# Altium PCB RP2040_minimal(1).PcbDoc
Units mm, origin at the board's own origin, x right, y up, seen from the top; angles counter-clockwise.
Board outline 52 x 51 mm, 2 copper layers (F.Cu, B.Cu); 34 components, 52 nets, 223 pads, 34 vias.
Unrouted connection lines stored in the file: 2.
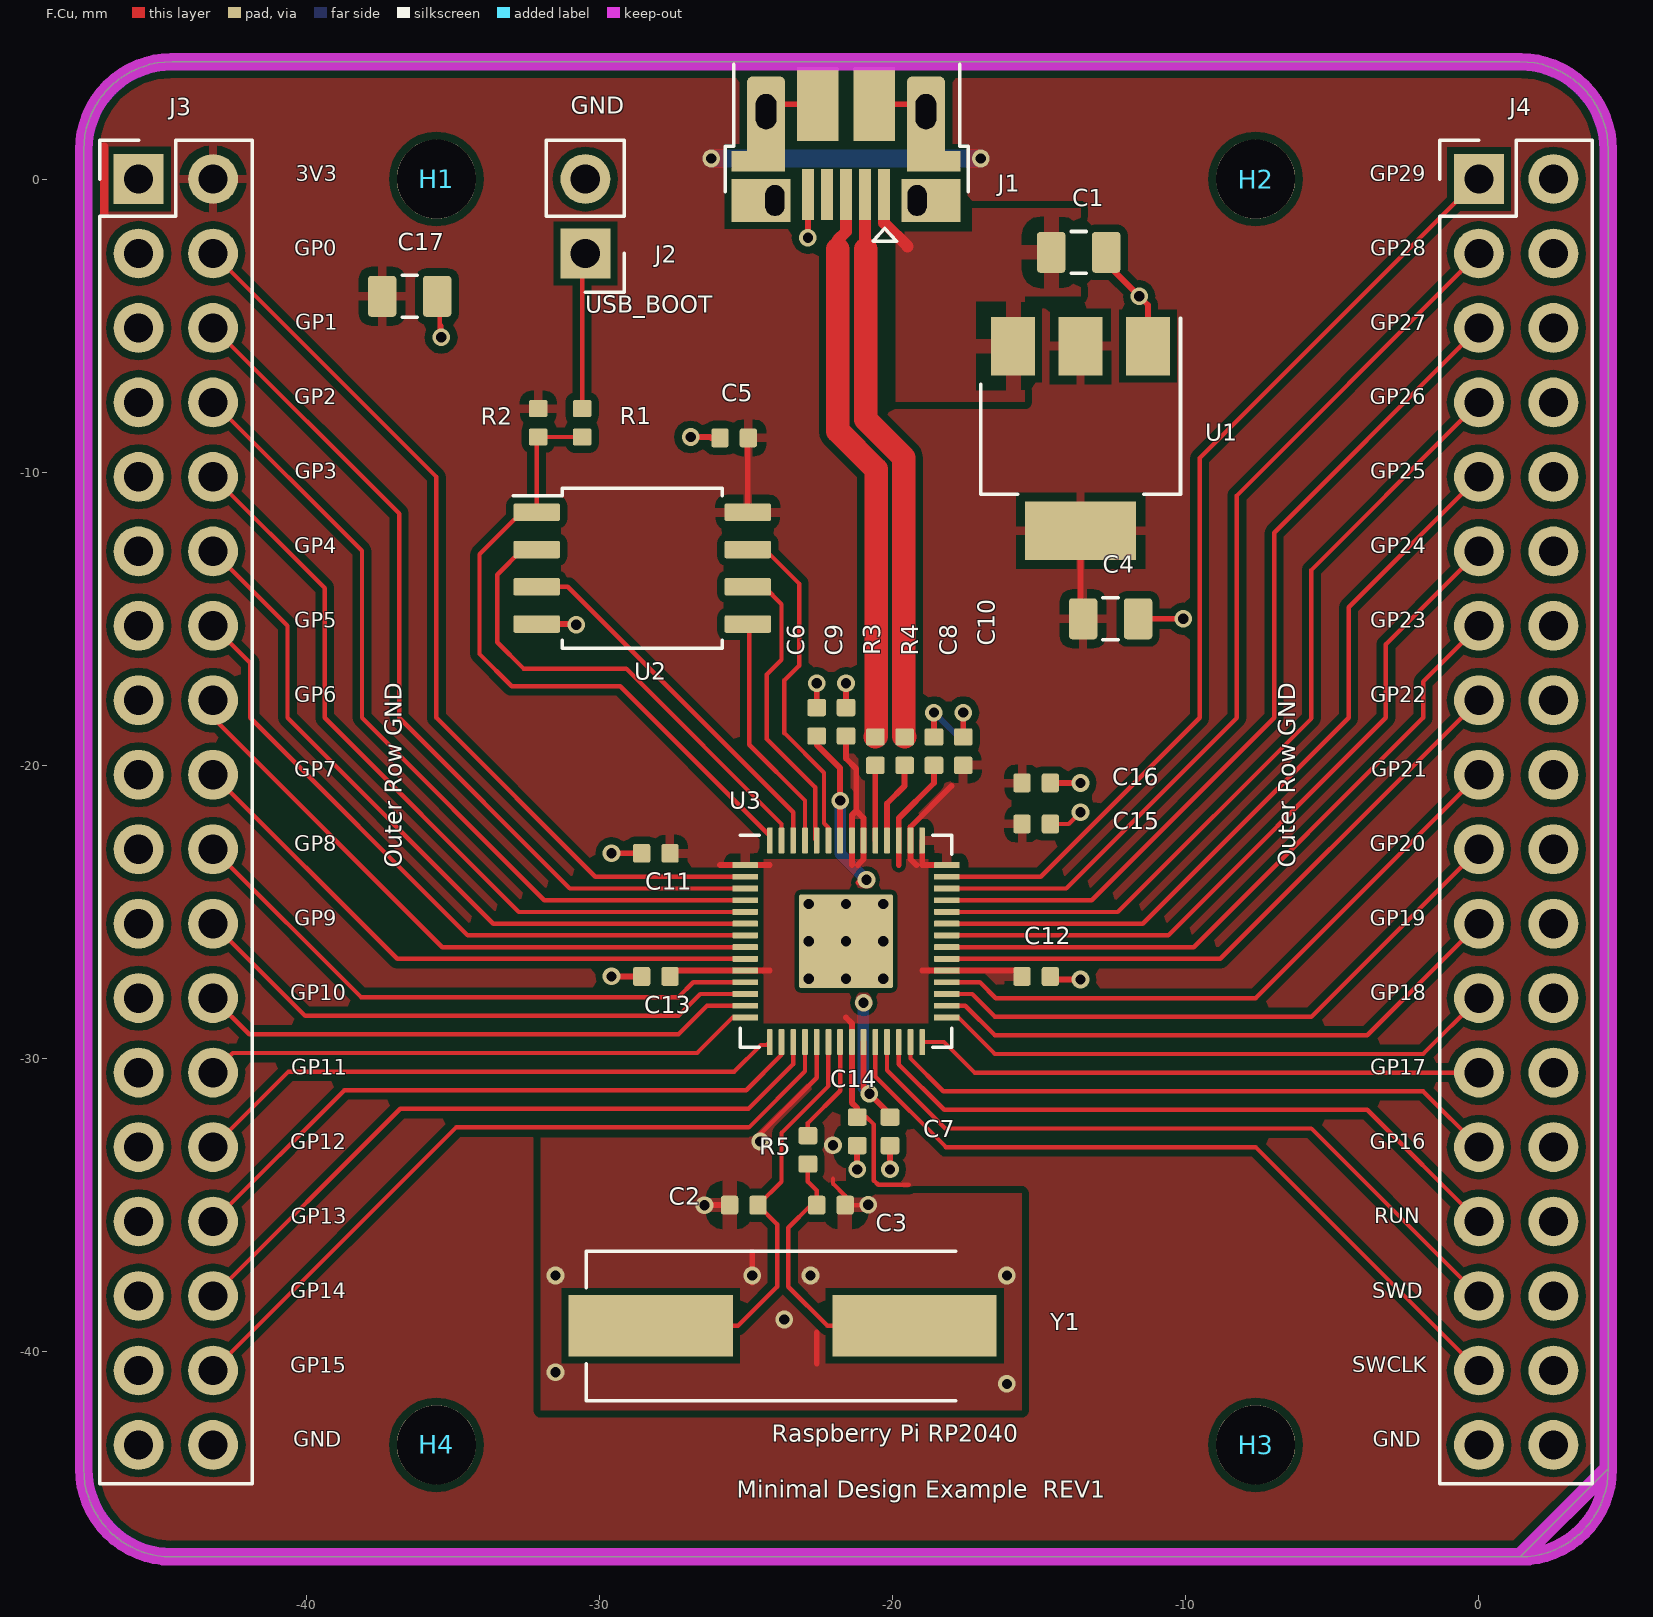
[diagram p0: F.Cu view]
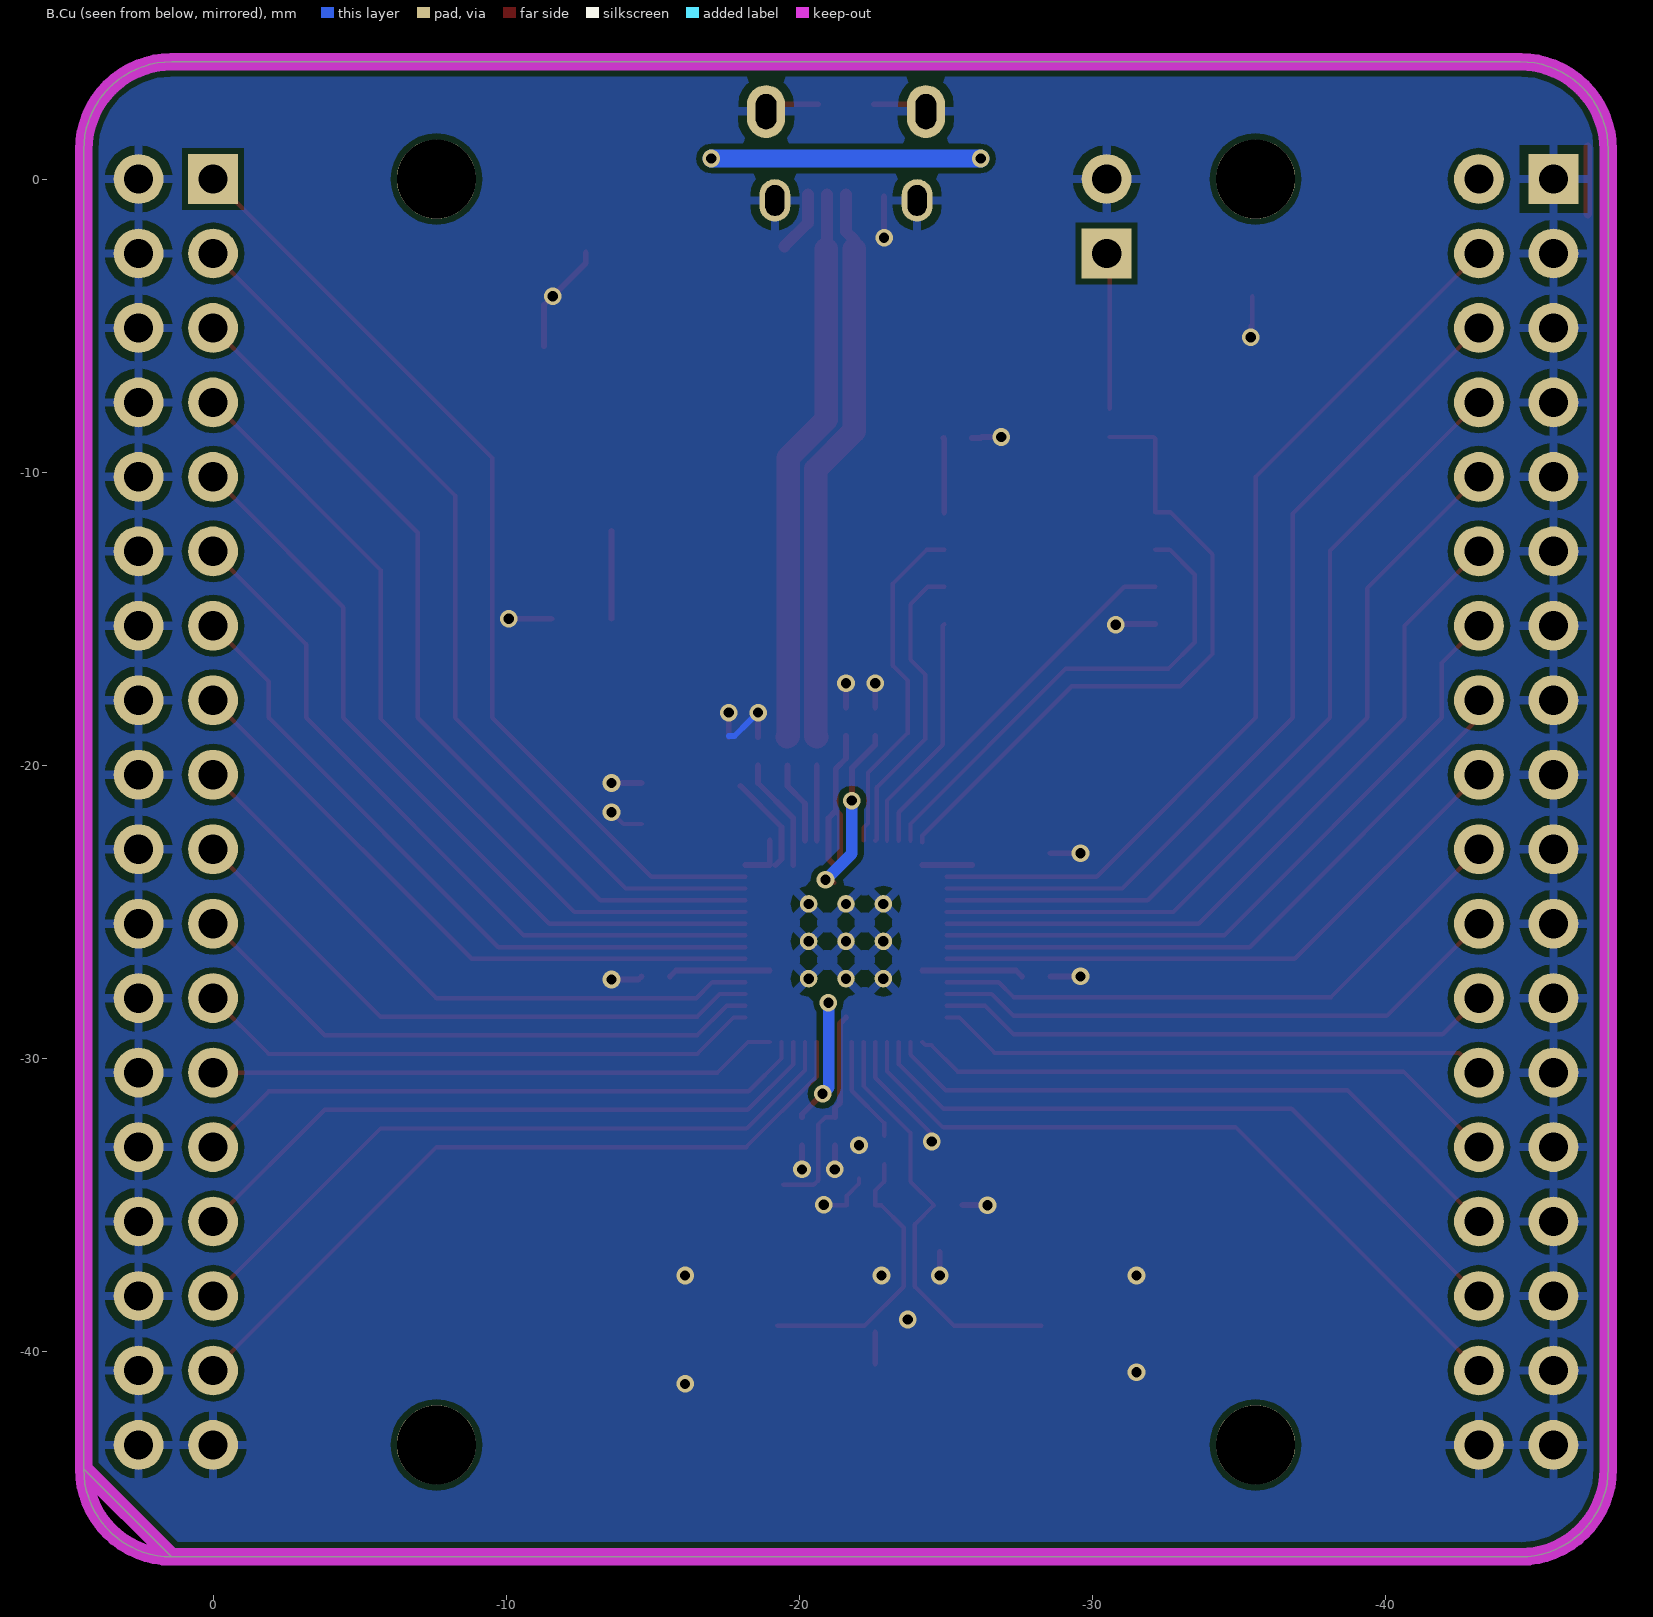
[diagram p1: B.Cu view, seen from below]

## Layer stack, top to bottom
F.Mask: solder mask 0.0102, Solder Resist, Dk 3.5
F.Cu: signal copper 0.0356
Dielectric 1: dielectric 0.32, FR-4, Dk 4.8
B.Cu: signal copper 0.0356
B.Mask: solder mask 0.0102, Solder Resist, Dk 3.5

## Board outline
1.41,-47 ccw(c1.41,-44) 4.41,-44 4.41,1 ccw(c1.41,1) 1.41,4 -44.59,4 ccw(c-44.59,1) -47.59,1 -47.59,-44 ccw(c-44.59,-44) -44.59,-47 1.41,-47 ccw(c1.41,-44) 1.41,-47

## Design rules (kind name [scope] priority, off if disabled: settings)
Clearance "Clearence 1_PadClass" [InPadClass('Pad Class Clearance 1')] p1: gap=1 ignorepadtopadclearanceinfootprint=FALSE
Clearance "Clearence 0.25_Polygon" [InNamedPolygon('F.Cu-GND') OR InNamedPolygon('F.Cu-+3V3-1')] p2: gap=0.25 ignorepadtopadclearanceinfootprint=FALSE
Clearance "Clearence 0.2_Polygon" [InNamedPolygon('B.Cu-GND') OR InNamedPolygon('F.Cu-VBUS')] p3: gap=0.2 ignorepadtopadclearanceinfootprint=FALSE
Clearance "Clearence 0.15_NetClass" [InNetClass('Default') OR InNetClass('USB_DIFF_90')] p4: gap=0.15 ignorepadtopadclearanceinfootprint=FALSE
Clearance "Clearence 0.15_Polygon" [InNamedPolygon('F.Cu-+3V3') OR InNamedPolygon('F.Cu-+1V1')] p5: gap=0.15 ignorepadtopadclearanceinfootprint=FALSE
HoleSize "Hole Size (Default)" [All] p1: absolutevalues=TRUE maxlimit=10 minlimit=0.35 maxpercent=80.000 minpercent=20.000
MinimumSolderMaskSliver [All] p1: minsoldermaskwidth=0
PolygonConnect Polygon_F.Cu-+3V3-1_ConnectDirect [IsNamedPolygon('F.Cu-+3V3-1') vs IsVia] p1: connectstyle=Direct reliefconductorwidth=0.254 reliefentries=4 polygonreliefangle="90 Angle" airgapwidth=0.254
PolygonConnect Polygon_F.Cu-+3V3-1_ConnectRelief45 [IsNamedPolygon('F.Cu-+3V3-1') vs (IsThruPin or IsSMTPin) and (PadShape_AllLayers = 'Round')] p2: connectstyle=Relief reliefconductorwidth=0.3 reliefentries=4 polygonreliefangle="45 Angle" airgapwidth=0.3
PolygonConnect Polygon_F.Cu-+3V3-1_ConnectRelief90 [IsNamedPolygon('F.Cu-+3V3-1') vs (IsThruPin or IsSMTPin) and (PadShape_AllLayers <> 'Round')] p3: connectstyle=Relief reliefconductorwidth=0.3 reliefentries=4 polygonreliefangle="90 Angle" airgapwidth=0.3
PolygonConnect Polygon_F.Cu-GND_ConnectDirect [IsNamedPolygon('F.Cu-GND') vs IsVia] p4: connectstyle=Direct reliefconductorwidth=0.254 reliefentries=4 polygonreliefangle="90 Angle" airgapwidth=0.254
PolygonConnect Polygon_F.Cu-GND_ConnectRelief45 [IsNamedPolygon('F.Cu-GND') vs (IsThruPin or IsSMTPin) and (PadShape_AllLayers = 'Round')] p5: connectstyle=Relief reliefconductorwidth=0.5 reliefentries=4 polygonreliefangle="45 Angle" airgapwidth=0.5
PolygonConnect Polygon_F.Cu-GND_ConnectRelief90 [IsNamedPolygon('F.Cu-GND') vs (IsThruPin or IsSMTPin) and (PadShape_AllLayers <> 'Round')] p6: connectstyle=Relief reliefconductorwidth=0.5 reliefentries=4 polygonreliefangle="90 Angle" airgapwidth=0.5
PolygonConnect Polygon_F.Cu-VBUS_ConnectDirect [IsNamedPolygon('F.Cu-VBUS') vs IsVia] p7: connectstyle=Direct reliefconductorwidth=0.254 reliefentries=4 polygonreliefangle="90 Angle" airgapwidth=0.254
PolygonConnect Polygon_F.Cu-VBUS_ConnectRelief45 [IsNamedPolygon('F.Cu-VBUS') vs (IsThruPin or IsSMTPin) and (PadShape_AllLayers = 'Round')] p8: connectstyle=Relief reliefconductorwidth=0.508 reliefentries=4 polygonreliefangle="45 Angle" airgapwidth=0.508
PolygonConnect Polygon_F.Cu-VBUS_ConnectRelief90 [IsNamedPolygon('F.Cu-VBUS') vs (IsThruPin or IsSMTPin) and (PadShape_AllLayers <> 'Round')] p9: connectstyle=Relief reliefconductorwidth=0.508 reliefentries=4 polygonreliefangle="90 Angle" airgapwidth=0.508
PolygonConnect Polygon_B.Cu-GND_ConnectDirect [IsNamedPolygon('B.Cu-GND') vs IsVia] p10: connectstyle=Direct reliefconductorwidth=0.254 reliefentries=4 polygonreliefangle="90 Angle" airgapwidth=0.254
PolygonConnect Polygon_B.Cu-GND_ConnectRelief45 [IsNamedPolygon('B.Cu-GND') vs (IsThruPin or IsSMTPin) and (PadShape_AllLayers = 'Round')] p11: connectstyle=Relief reliefconductorwidth=0.3 reliefentries=4 polygonreliefangle="45 Angle" airgapwidth=0.3
PolygonConnect Polygon_B.Cu-GND_ConnectRelief90 [IsNamedPolygon('B.Cu-GND') vs (IsThruPin or IsSMTPin) and (PadShape_AllLayers <> 'Round')] p12: connectstyle=Relief reliefconductorwidth=0.3 reliefentries=4 polygonreliefangle="90 Angle" airgapwidth=0.3
PolygonConnect Polygon_F.Cu-+1V1_ConnectDirect [IsNamedPolygon('F.Cu-+1V1')] p13: connectstyle=Direct reliefconductorwidth=0.254 reliefentries=4 polygonreliefangle="90 Angle" airgapwidth=0.254
PolygonConnect Polygon_F.Cu-+3V3_ConnectDirect [IsNamedPolygon('F.Cu-+3V3')] p14: connectstyle=Direct reliefconductorwidth=0.254 reliefentries=4 polygonreliefangle="90 Angle" airgapwidth=0.254
RoutingVias [All] p1: holewidth=0.711 width=1.27 viastyle="Through Hole" minholewidth=0.711 minwidth=1.27 maxholewidth=0.711 maxwidth=1.27
SilkToSilkClearance [All] p1: silktosilkclearance=0
SilkToSolderMaskClearance [IsPad] p1: minsilkscreentomaskgap=0 clearancetoexposedcopper=TRUE
SolderMaskExpansion [All] p1: expansion=0.102 istentingtop=FALSE
Width [All] p1: maxlimit=10 minlimit=0.15 preferedwidth=0.15 minimp=50.000000 maximp=50.000000 favimp=50.000000
26 further rules are at their usual default settings.

## Components (designator, comment, footprint, x,y, rotation, side; value= is the part's Value field where it differs from the comment)
C1 "10u" C_0805_2012Metric -13.652,-2.5 r0 top
C2 "27p" C_0402_1005Metric -25.075,-35 r180 top
C3 "27p" C_0402_1005Metric -22.105,-35 r0 top
C4 "10u" C_0805_2012Metric -12.565,-15 r0 top
C5 "100n" C_0402_1005Metric -25.405,-8.83 r180 top
C6 "100n" C_0402_1005Metric -22.59,-18.515 r90 top
C7 "100n" C_0402_1005Metric -20.09,-32.485 r270 top
C8 "1u" C_0402_1005Metric -18.59,-19.515 r90 top
C9 "100n" C_0402_1005Metric -21.59,-18.515 r90 top
C10 "1u" C_0402_1005Metric -17.59,-19.515 r90 top
C11 "100n" C_0402_1005Metric -28.075,-23 r180 top
C12 "100n" C_0402_1005Metric -15.105,-27.2 r0 top
C13 "100n" C_0402_1005Metric -28.075,-27.2 r180 top
C14 "100n" C_0402_1005Metric -21.209,-32.485 r270 top
C15 "100n" C_0402_1005Metric -15.105,-22 r0 top
C16 "100n" C_0402_1005Metric -15.105,-20.6 r0 top
C17 "10u" C_0805_2012Metric -36.475,-4 r0 top
H1 "MountingHole" MountingHole_2.7mm_M2.5 -35.56,0 r0 top
H2 "MountingHole" MountingHole_2.7mm_M2.5 -7.62,0 r0 top
H3 "MountingHole" MountingHole_2.7mm_M2.5 -7.62,-43.18 r0 top
H4 "MountingHole" MountingHole_2.7mm_M2.5 -35.56,-43.18 r0 top
J1 "USB_B_Micro" USB_Micro-B_Amphenol_10103594-0001LF_Horizontal_modified -21.59,2.3 r180 top
J2 "Conn_01x02" PinHeader_1x02_P2.54mm_Vertical -30.48,-2.54 r180 top
J3 "Conn_02x18_Odd_Even" PinHeader_2x18_P2.54mm_Vertical -45.72,0 r0 top
J4 "Conn_02x18_Odd_Even" PinHeader_2x18_P2.54mm_Vertical 0,0 r0 top
R1 "1k" C_0402_1005Metric -30.59,-8.315 r90 top
R2 "DNF" C_0402_1005Metric -32.09,-8.315 r270 top
R3 "27" C_0402_1005Metric -20.59,-19.515 r270 top
R4 "27" C_0402_1005Metric -19.59,-19.515 r270 top
R5 "1k" C_0402_1005Metric -22.89,-33.115 r270 top
U1 "NCP1117-3.3_SOT223" SOT-223-3_TabPin2 -13.59,-8.85 r270 top
U2 "W25Q128JVS" SOIC-8_5.23x5.23mm_P1.27mm -28.54,-13.275 r0 top
U3 "RP2040" RP2040-QFN-56 -21.59,-26 r0 top
Y1 "ABLS-12.000MHZ-B4-T" Crystal_SMD_HC49-US -23.749,-39.116 r0 top

## Footprints (in the part's own frame and the unit in brackets; to place one, negate y for a bottom-side part, rotate by r counter-clockwise, add the part's x,y. Pads: shape width x height; smd on the part's side, far side on the other; paste and mask are expansions set on the pad)
C_0402_1005Metric [mm]
  rrect25% 0.59x0.64 smd mask+0.051: 1(-0.485,0) 2(0.485,0)
C_0805_2012Metric [mm]
  rrect25% 0.975x1.4 smd mask+0.051: 1(-0.937,0) 2(0.937,0)
  silkscreen extent -0.26,-0.71 0.26,0.71
Crystal_SMD_HC49-US [mm]
  rect 5.6x2.1 smd mask+0.051: 1(-4.5,0) 2(4.5,0)
  silkscreen extent -6.7,-2.55 5.9,2.55
MountingHole_2.7mm_M2.5 [mm]
  round 2.7 hole 2.7 paste-2.7 mask+0.051: Un1(0,0)
PinHeader_1x02_P2.54mm_Vertical [mm]
  rect 1.7x1.7 hole 1 paste-1.7 mask+0.051: 1(0,0)
  rrect100% 1.7x1.7 hole 1 paste-1.7 mask+0.051: 2(0,-2.54)
  silkscreen extent -1.33,-3.87 1.33,1.33
PinHeader_2x18_P2.54mm_Vertical [mm]
  rect 1.7x1.7 hole 1 paste-1.7 mask+0.051: 1(0,0)
  rrect100% 1.7x1.7 hole 1 paste-1.7 mask+0.051: 2(2.54,0) 3(0,-2.54) 4(2.54,-2.54) 5(0,-5.08) 6(2.54,-5.08) 7(0,-7.62) 8(2.54,-7.62) 9(0,-10.16) 10(2.54,-10.16) 11(0,-12.7) 12(2.54,-12.7) 13(0,-15.24) 14(2.54,-15.24) 15(0,-17.78) 16(2.54,-17.78) 17(0,-20.32) 18(2.54,-20.32) 19(0,-22.86) 20(2.54,-22.86) 21(0,-25.4) 22(2.54,-25.4) 23(0,-27.94) 24(2.54,-27.94) 25(0,-30.48) 26(2.54,-30.48) 27(0,-33.02) 28(2.54,-33.02) 29(0,-35.56) 30(2.54,-35.56) 31(0,-38.1) 32(2.54,-38.1) 33(0,-40.64) 34(2.54,-40.64) 35(0,-43.18) 36(2.54,-43.18)
  silkscreen extent -1.33,-44.51 3.87,1.33
RP2040-QFN-56 [mm]
  rrect25% 0.875x0.2 smd mask+0.051: 1(-3.437,2.6) 2(-3.437,2.2) 3(-3.437,1.8) 4(-3.437,1.4) 5(-3.437,1) 6(-3.437,0.6) 7(-3.437,0.2) 8(-3.437,-0.2) 9(-3.437,-0.6) 10(-3.437,-1) 11(-3.437,-1.4) 12(-3.437,-1.8) 13(-3.437,-2.2) 14(-3.437,-2.6) 29(3.437,-2.6) 30(3.437,-2.2) 31(3.437,-1.8) 32(3.437,-1.4) 33(3.437,-1) 34(3.437,-0.6) 35(3.437,-0.2) 36(3.437,0.2) 37(3.437,0.6) 38(3.437,1) 39(3.437,1.4) 40(3.437,1.8) 41(3.437,2.2) 42(3.437,2.6)
  rrect25% 0.2x0.875 smd mask+0.051: 15(-2.6,-3.437) 16(-2.2,-3.437) 17(-1.8,-3.437) 18(-1.4,-3.437) 19(-1,-3.437) 20(-0.6,-3.437) 21(-0.2,-3.437) 22(0.2,-3.437) 23(0.6,-3.437) 24(1,-3.437) 25(1.4,-3.437) 26(1.8,-3.437) 27(2.2,-3.437) 28(2.6,-3.437) 43(2.6,3.437) 44(2.2,3.437) 45(1.8,3.437) 46(1.4,3.437) 47(1,3.437) 48(0.6,3.437) 49(0.2,3.437) 50(-0.2,3.437) 51(-0.6,3.437) 52(-1,3.437) 53(-1.4,3.437) 54(-1.8,3.437) 55(-2.2,3.437) 56(-2.6,3.437)
  round 0.6 hole 0.35 paste-0.6 mask-0.6: 57(-1.275,-1.275) 57(-1.275,0) 57(-1.275,1.275) 57(0,-1.275) 57(0,0) 57(0,1.275) 57(1.275,-1.275) 57(1.275,0) 57(1.275,1.275)
  rrect4% 3.2x3.2 smd paste-3.2 mask+0.051: 57(0,0)
  rrect23% 1.084x1.084 on Top Paste mask-1.084: Un1(0.637,-0.637) Un2(0.637,0.637) Un3(-0.637,-0.637) Un4(-0.637,0.637)
  silkscreen extent -3.61,-3.61 3.61,3.61
SOIC-8_5.23x5.23mm_P1.27mm [mm]
  rrect25% 1.6x0.6 smd mask+0.051: 1(-3.6,1.905) 2(-3.6,0.635) 3(-3.6,-0.635) 4(-3.6,-1.905) 5(3.6,-1.905) 6(3.6,-0.635) 7(3.6,0.635) 8(3.6,1.905)
  silkscreen extent -4.4,-2.73 2.73,2.73
SOT-223-3_TabPin2 [mm]
  rect 2x1.5 smd mask+0.051: 1(-3.15,2.3) 2(-3.15,0) 3(-3.15,-2.3)
  rect 2x3.8 smd mask+0.051: 2(3.15,0)
  silkscreen extent -4.1,-3.41 1.91,3.41
USB_Micro-B_Amphenol_10103594-0001LF_Horizontal_modified [mm]
  rect 0.4x1.75 smd mask+0.051: 1(-1.3,2.825) 2(-0.65,2.825) 3(0,2.825) 4(0.65,2.825) 5(1.3,2.825)
  rect 1.825x0.7 smd mask+0.051: 6(-2.987,1.7) 6(2.987,1.7)
  rect 2x1.46 smd mask+0.051: 6(-2.9,3.03) 6(2.9,3.03)
  rrect100% 1.3x1.8 hole 0.7 slot 1.2 at 90 deg paste-1.8 mask+0.051: 6(-2.725,0) 6(2.725,0)
  rrect30% 1.3x3.25 smd mask+0.051: 6(-2.725,0.425) 6(2.725,0.425)
  rrect100% 1.05x1.45 hole 0.65 slot 1.05 at 90 deg paste-1.45 mask+0.051: 6(-2.425,3.03) 6(2.425,3.03)
  rect 1.425x2.5 smd mask+0.051: 6(-0.962,-0.25) 6(0.962,-0.25)
  silkscreen extent -4.18,-1.62 4.13,4.43

## Part data
C1 C2 C3 C4 C5 C6 C7 C8 C9 C10 C11 C12 C13 C14 C15 C16 C17: library part C
J3 J4: library part PinHeader_2x18_P2.54mm_Vertical, "Through hole straight pin header, 2x18, 2.54mm pitch, double rows"
R1 R2 R3 R4 R5: library part R
Y1: library part Crystal

## Via types
v1: diameter 0.6, hole 0.35, F.Cu to B.Cu, tented both sides, 34 vias

## Nets (pads, with @x,y where several pads share a name; then routed paths per layer and width w, separated by ;. In a path a pad name is that pad's centre, name@x,y a point inside that pad or via, vN(x,y) a via of type N, cw(c..) or ccw(c..) an arc to the next point about the centre after c; other vN are vias at no path point)
+1V1: C6.1 C7.1 C8.1 U3.23 U3.45 U3.50 | length 17.3
  F.Cu w0.15: -21.19,-24 -21.09,-23.9 v1(-20.89,-23.9)
  F.Cu w0.2: C6.1 -22.59,-19.295 -21.79,-20.095 -21.79,-20.776 v1(-21.79,-21.2) U3.50 ; U3.23 -20.99,-31 v1(-20.79,-31.2) -20.09,-31.9 C7.1 ; -19.79,-23.4 U3.45 -19.79,-21.8 -18.59,-20.6 C8.1
  B.Cu w0.4: v1(-21.79,-21.2) -21.79,-23.01 -20.9,-23.9 v1(-20.89,-23.9) ; v1(-20.99,-28.1) -21,-28.11 -21,-30.99 v1(-20.79,-31.2)
+3V3: C4.1 C5.1 C9.1 C10.1 C11.1 C12.1 C13.1 C14.1 C15.1 C16.1 C17.1 J3.2 R2.1 U1.2 U2.8 U3.1 U3.10 U3.22 U3.33 U3.42 U3.43 U3.44 U3.48 U3.49 | length 45.2
  F.Cu w0.15: C14.1 -20.889,-32 -20.637,-32.252 -20.637,-34.163 -20.493,-34.307 -19.448,-34.307
  F.Cu w0.2: C13.1 -27.39,-27 U3.10 -24.19,-27 ; -25.89,-23.4 U3.1 -24.19,-23.4 ; U2.8 -24.94,-8.85 C5.1 ; -21.59,-28.6 -21.39,-28.8 U3.22 -21.39,-31.505 -21.209,-31.686 C14.1 ; C9.1 -21.59,-19.763 -21.24,-20.113 -21.24,-21.55 ; U3.49@-21.39,-23 -21.39,-23.4 U3.49 -21.39,-21.7 -21.24,-21.55 ; -21.19,-23.4 -20.99,-23.2 U3.48 -20.99,-21.8 -21.24,-21.55 ; -19.19,-23.4 -19.39,-23.2 U3.44 -19.39,-22.1 -17.99,-20.7 ; -18.99,-27 U3.33 -15.79,-27 C12.1 ; U3.43 -18.99,-23.4 U3.42 ; C4.1@-13.59,-15 U1.2@-13.59,-12
  F.Cu w0.3: -46.89,-1.2 -46.89,1.1
  B.Cu w0.6: v1(-26.19,0.7) v1(-16.99,0.7)
GND: C1.2 C2.2 C3.2 C4.2 C5.2 C6.2 C7.2 C8.2 C9.2 C10.2 C11.2 C12.2 C13.2 C14.2 C15.2 C16.2 C17.2 J1.5 J1.6 J2.2 J3.1 J3.3 J3.5 J3.7 J3.9 J3.11 J3.13 J3.15 J3.17 J3.19 J3.21 J3.23 J3.25 J3.27 J3.29 J3.31 J3.33 J3.35 J3.36 J4.2 J4.4 J4.6 J4.8 J4.10 J4.12 J4.14 J4.16 J4.18 J4.20 J4.22 J4.24 J4.26 J4.28 J4.30 J4.32 J4.34 J4.35 J4.36 U1.1 U2.4 U3.19 U3.57 | length 34.8
  F.Cu w0.15: v1@-35.45,-5.25 C17.2@-35.45,-4 ; -35.45,-4.95 -35.4,-5 -35.4,-5.1 ; v1(-24.511,-32.829) -24.511,-32.575 -22.59,-30.655 U3.19 ; -22.034,-34.099 -22.034,-34.266 -21.62,-34.68 C3.2 -20.84,-35 v1(-20.828,-34.989) ; C15.2 -13.99,-22 v1(-13.59,-21.6)
  F.Cu w0.2: U2.4 -30.81,-15.18 v1(-30.79,-15.2) ; v1(-29.59,-27.2) C13.2 ; v1(-29.59,-23) C11.2 ; v1(-26.89,-8.8) -26.215,-8.8 -26.185,-8.83 C5.2 ; v1(-26.416,-35) C2.2 ; v1@-24.79,-37.65 -24.79,-36.6 ; J1.6@-24.32,2.28 -24.05,2.55 J1.6@-22.55,2.55 ; v1(-22.89,-2) J1.5@-22.89,-0.6 ; -22.59,-40.4 -22.59,-39.35 ; C6.2 v1(-22.59,-17.2) ; C9.2 v1(-21.59,-17.2) ; v1(-21.209,-33.782) C14.2 ; J1.6@-20.63,2.55 -19.13,2.55 J1.6@-18.86,2.28 ; v1(-20.09,-33.782) C7.2 ; C8.2 v1(-18.59,-18.2) ; C10.2 v1(-17.59,-18.2) ; C12.2 -14.515,-27.305 v1(-13.59,-27.305) ; C16.2 v1(-13.59,-20.6) ; C1.2 -12.715,-2.875 v1(-11.59,-4) -11.29,-4.3 U1.1 ; C4.2@-11.54,-15 v1(-10.09,-15)
  B.Cu w0.2: v1(-18.59,-18.2) -18.29,-18.5 -17.79,-19 -17.59,-19
  other v1: -16.1,-41.1 -31.5,-40.7 -23.7,-38.9 -31.5,-37.4 -24.79,-37.4 -22.8,-37.4 -16.1,-37.4 -22.034,-32.956 -35.4,-5.4
GPIO0: J3.4 U3.2 | length 31.8
  F.Cu w0.15: J3.4 -35.56,-10.16 -35.56,-18.38 -30.14,-23.8 U3.2
GPIO1: J3.6 U3.3 | length 30.2
  F.Cu w0.15: J3.6 -43.162,-5.08 -36.83,-11.413 -36.83,-18.38 -31.01,-24.2 U3.3
GPIO2: J3.8 U3.4 | length 28.5
  F.Cu w0.15: J3.8 -43.162,-7.62 -38.1,-12.683 -38.1,-18.38 -31.88,-24.6 U3.4
GPIO3: J3.10 U3.5 | length 26.9
  F.Cu w0.15: J3.10 -43.162,-10.16 -39.37,-13.953 -39.37,-18.38 -32.75,-25 U3.5
GPIO4: J3.12 U3.6 | length 25.3
  F.Cu w0.15: J3.12 -40.64,-15.24 -40.64,-18.38 -33.62,-25.4 U3.6
GPIO5: J3.14 U3.7 | length 23.6
  F.Cu w0.15: J3.14 -41.91,-16.51 -41.91,-18.38 -34.49,-25.8 U3.7
GPIO6: J3.16 U3.8 | length 22
  F.Cu w0.15: J3.16 -43.18,-18.38 -35.36,-26.2 U3.8
GPIO7: J3.18 U3.9 | length 20.8
  F.Cu w0.15: J3.18 -36.9,-26.6 U3.9
GPIO8: J3.20 U3.11 | length 20.5
  F.Cu w0.15: J3.20 -38.135,-27.905 -27.305,-27.905 -26.8,-27.4 U3.11
GPIO9: J3.22 U3.12 | length 19.8
  F.Cu w0.15: J3.22 -40.04,-28.54 -27.305,-28.54 -26.565,-27.8 U3.12
GPIO10: J3.24 U3.13 | length 19.1
  F.Cu w0.15: J3.24 -41.945,-29.175 -27.305,-29.175 -26.33,-28.2 U3.13
GPIO11: J3.26 U3.14 | length 18.9
  F.Cu w0.15: J3.26 -42.51,-29.81 -26.67,-29.81 -25.46,-28.6 U3.14
GPIO12: J3.28 U3.15 | length 20.5
  F.Cu w0.15: J3.28 -40.605,-30.445 -25.4,-30.445 -24.493,-29.537 -24.29,-29.537 U3.15
GPIO13: J3.30 U3.16 | length 22.2
  F.Cu w0.15: J3.30 -38.7,-31.08 -24.995,-31.08 -23.79,-29.875 U3.16
GPIO14: J3.32 U3.17 | length 23.8
  F.Cu w0.15: J3.32 -36.795,-31.715 -24.915,-31.715 -23.39,-30.19 U3.17
GPIO15: J3.34 U3.18 | length 25.4
  F.Cu w0.15: J3.34 -34.89,-32.35 -24.902,-32.35 -22.99,-30.438 U3.18
GPIO16: J4.27 U3.27 | length 21.2
  F.Cu w0.15: U3.27 -19.39,-30 -18.275,-31.115 -1.905,-31.115 J4.27
GPIO17: J4.25 U3.28 | length 19.4
  F.Cu w0.15: U3.28 -18.247,-29.438 -17.205,-30.48 J4.25
GPIO18: J4.23 U3.29 | length 19.5
  F.Cu w0.15: U3.29 -17.755,-28.6 -16.51,-29.845 -1.905,-29.845 J4.23
GPIO19: J4.21 U3.30 | length 20.1
  F.Cu w0.15: U3.30 -17.52,-28.2 -16.51,-29.21 -3.81,-29.21 -1.27,-26.67 J4.21
GPIO20: J4.19 U3.31 | length 20.8
  F.Cu w0.15: U3.31 -17.285,-27.8 -16.51,-28.575 -5.715,-28.575 -1.27,-24.13 J4.19
GPIO21: J4.17 U3.32 | length 21.5
  F.Cu w0.15: U3.32 -17.021,-27.4 -16.481,-27.94 -7.62,-27.94 -1.27,-21.59 J4.17
GPIO22: J4.15 U3.34 | length 21.8
  F.Cu w0.15: U3.34 -8.82,-26.6 -1.27,-19.05 J4.15
GPIO23: J4.13 U3.35 | length 23.4
  F.Cu w0.15: U3.35 -16.39,-26.2 -9.725,-26.2 -1.905,-18.38 -1.905,-17.145 J4.13
GPIO24: J4.11 U3.36 | length 25
  F.Cu w0.15: U3.36 -10.595,-25.8 -3.175,-18.38 -3.175,-15.875 -0.67,-13.37 J4.11
GPIO25: J4.9 U3.37 | length 26.7
  F.Cu w0.15: U3.37 -11.465,-25.4 -4.445,-18.38 -4.445,-14.605 -0.67,-10.83 J4.9
GPIO26_ADC0: J4.7 U3.38 | length 28.3
  F.Cu w0.15: U3.38 -12.318,-25 -5.715,-18.398 -5.715,-13.335 -0.67,-8.29 J4.7
GPIO27_ADC1: J4.5 U3.39 | length 29.9
  F.Cu w0.15: U3.39 -13.205,-24.6 -6.985,-18.38 -6.985,-12.065 -0.67,-5.75 J4.5
GPIO28_ADC2: J4.3 U3.40 | length 31.6
  F.Cu w0.15: U3.40 -14.075,-24.2 -8.255,-18.38 -8.255,-10.795 -0.66,-3.2 J4.3
GPIO29_ADC3: J4.1 U3.41 | length 33.2
  F.Cu w0.15: U3.41 -14.945,-23.8 -9.525,-18.38 -9.525,-9.516 -0.009,0 J4.1
Net-(C3-Pad1): C3.1 R5.2 Y1.2 | length 9.7
  F.Cu w0.15: R5.2 -22.89,-34.2 -22.59,-34.5 C3.1 -22.788,-35 -23.558,-35.771 -23.558,-37.782 -22.225,-39.116 Y1.2
Net-(J1-Pad4): J1.4
Net-(R3-Pad2): R3.2 U3.47 | length 2.6
  F.Cu w0.2: U3.47 R3.2
Net-(R4-Pad2): R4.2 U3.46 | length 2.8
  F.Cu w0.2: U3.46 -20.19,-21.3 -19.59,-20.7 R4.2
QSPI_SCLK: U2.6 U3.52 | length 10.4
  F.Cu w0.15: U2.6 -24.38,-13.91 -23.79,-14.5 -23.79,-16.4 -24.29,-16.9 -24.29,-19.1 -22.639,-20.751 -22.639,-22.524 U3.52@-22.59,-22.572
QSPI_SD0: U2.5 U3.53 | length 8.2
  F.Cu w0.15: U2.5 -24.89,-15.23 -24.89,-19.3 -22.99,-21.2 U3.53@-22.99,-22.572
QSPI_SD1: U2.2 U3.55 | length 16.8
  F.Cu w0.15: U2.2 -32.63,-12.64 -33.49,-13.5 -33.49,-15.8 -32.59,-16.7 -29.09,-16.7 -23.79,-22 U3.55@-23.79,-22.572
QSPI_SD2: U2.3 U3.54 | length 12.9
  F.Cu w0.15: U2.3 -31.08,-13.91 -23.39,-21.6 U3.54@-23.39,-22.572
QSPI_SD3: U2.7 U3.51 | length 11.8
  F.Cu w0.15: U2.7 -24.35,-12.64 -23.19,-13.8 -23.19,-16.6 -23.69,-17.1 -23.69,-18.9 -22.339,-20.251 -22.339,-21.976 -22.19,-22.125 U3.51
QSPI_SS: R1.1 R2.2 U2.1 U3.56 | length 22.7
  F.Cu w0.15: R1.1 R2.2 -32.14,-8.85 U2.1 -32.66,-11.37 -34.09,-12.8 -34.09,-16.2 -32.99,-17.3 -29.29,-17.3 -24.19,-22.4 -24.19,-22.6 U3.56@-24.19,-22.628
RUN: J4.29 U3.26 | length 22.8
  F.Cu w0.15: U3.26 -19.79,-30.2 -18.24,-31.75 -3.81,-31.75 J4.29
SWCLK: J4.33 U3.24 | length 25.9
  F.Cu w0.15: U3.24 -20.59,-30.612 -18.182,-33.02 -7.62,-33.02 J4.33
SWD: J4.31 U3.25 | length 24.3
  F.Cu w0.15: U3.25 -20.19,-30.4 -18.205,-32.385 -5.715,-32.385 J4.31
U\S\B\_\B\O\O\T\: J2.1 R1.2 | length 5.3
  F.Cu w0.15: R1.2 -30.59,-2.65 J2.1
USB_D+: J1.3 R3.1 | length 19.2
  F.Cu w0.4: -21.865,-2.4 -21.865,-2.075 -21.59,-1.8 J1.3
  F.Cu w0.8: -21.865,-2.4 -21.865,-8.597 -20.565,-9.897 -20.565,-19.005 R3.1
USB_D-: J1.2 R4.1 | length 19.1
  F.Cu w0.4: J1.2 -20.94,-2.375 -20.915,-2.4
  F.Cu w0.8: -20.915,-2.4 -20.915,-8.203 -19.615,-9.503 -19.615,-19.005 R4.1
VBUS: C1.1 J1.1 U1.3 | length 2.1
  F.Cu w0.4: J1.1 -20.29,-1.5 -19.49,-2.3
XIN: C2.1 U3.20 Y1.1 | length 14.5
  F.Cu w0.15: Y1.1 -25.273,-39.116 -23.939,-37.782 -23.939,-35.651 C2.1 -23.79,-34.2 -23.79,-32.538 -22.19,-30.938 U3.20
XOUT: R5.1 U3.21 | length 3.6
  F.Cu w0.15: R5.1 -22.89,-32.2 -21.79,-31.1 U3.21
pads on no net: H1.Un1 H2.Un1 H3.Un1 H4.Un1 U3.Un1 U3.Un2 U3.Un3 U3.Un4

## Polygon pours and split planes (outlines as drawn)
+3V3 on F.Cu "F.Cu-+3V3-1" (solid, remove dead copper, pour order 9): 3.91,-46.5 -47.09,-46.5 -47.09,3.5 3.91,3.5
GND on F.Cu "F.Cu-GND" (solid, remove dead copper, pour order 6): -15.6,-34.6 -15.6,-42 -32,-42 -32,-32.7 -24.9,-32.7 -22.8,-30.6 -21.6,-30.6 -21.6,-34.6
VBUS on F.Cu "F.Cu-VBUS" (solid, remove dead copper, pour order 8): -13.59,-4 -15.49,-4 -15.49,-7.6 -19.89,-7.6 -19.89,-1.8 -17.29,-1.8 -17.29,-1 -13.59,-1
+1V1 on F.Cu "F.Cu-+1V1" (solid, remove dead copper, pour order 5): -19.59,-24.2 -23.19,-24.2 -23.19,-27.6 -20.59,-27.6 -20.59,-28.4 -21.39,-28.4 -21.39,-28.2 -23.79,-28.2 -23.79,-23.8 -20.99,-23.8 -20.99,-23.6 -20.59,-23.6 -20.59,-23.2 -19.59,-23.2
+3V3 on F.Cu "F.Cu-+3V3" (solid, remove dead copper, pour order 4): -18.79,-28.8 -24.39,-28.8 -24.39,-23.2 -21.59,-23.2 -20.79,-23.2 -18.79,-23.2
GND on B.Cu "B.Cu-GND" (solid, remove dead copper, pour order 7): 3.91,-46.5 -47.09,-46.5 -47.09,3.5 3.91,3.5

## Keep-outs
Edge.Cuts:
  lines w0.6: -47.59,-44 ccw(c-44.59,-44) -44.59,-47 ; -47.59,-44 ccw(c-44.59,-44) -44.59,-47 ; -47.59,-44 -47.59,1 ; -47.59,-44 -47.59,1 ; -47.59,1 cw(c-44.59,1) -44.59,4 ; -47.59,1 cw(c-44.59,1) -44.59,4 ; -44.59,-47 1.41,-47 ; -44.59,-47 1.41,-47 ; -44.59,4 1.41,4 ; -44.59,4 1.41,4 ; 1.41,-47 ccw(c1.41,-44) 4.41,-44 ; 1.41,-47 ccw(c1.41,-44) 4.41,-44 ; 1.41,-47 ccw(c1.41,-44) 4.41,-44 ; 1.41,-47 ccw(c1.41,-44) 4.41,-44 ; 1.41,-47 4.41,-44 ; 1.41,4 cw(c1.41,1) 4.41,1 ; 1.41,4 cw(c1.41,1) 4.41,1 ; 4.41,-44 4.41,1 ; 4.41,-44 4.41,1

## Silkscreen, mask and mechanical layers (free items; w line width, h text height)
F.SilkS:
  text "GND" at -30.978,2.016 h1
  text "3V3" at -40.356,-0.257 h0.9
  text "GP29" at -3.717,-0.256 h0.9
  text "GP0" at -40.41,-2.797 h0.9
  text "GP28" at -3.716,-2.797 h0.9
  text "USB_BOOT" at -30.478,-4.764 h1
  text "GP1" at -40.372,-5.336 h0.9
  text "GP27" at -3.713,-5.337 h0.9
  text "GP2" at -40.404,-7.876 h0.9
  text "GP26" at -3.717,-7.877 h0.9
  text "GP3" at -40.398,-10.417 h0.9
  text "GP25" at -3.709,-10.417 h0.9
  text "GP4" at -40.409,-12.956 h0.9
  text "GP24" at -3.715,-12.956 h0.9
  text "GP5" at -40.403,-15.497 h0.9
  text "GP23" at -3.704,-15.497 h0.9
  text "GP6" at -40.41,-18.037 h0.9
  text "GP22" at -3.711,-18.036 h0.9
  text "GP7" at -40.407,-20.577 h0.9
  text "GP21" at -3.678,-20.576 h0.9
  text "GP8" at -40.409,-23.117 h0.9
  text "GP20" at -3.717,-23.117 h0.9
  text "Outer Row GND" at -36.544,-23.487 h1 r90
  text "Outer Row GND" at -6.064,-23.487 h1 r90
  text "GP9" at -40.41,-25.656 h0.9
  text "GP19" at -3.717,-25.656 h0.9
  text "GP10" at -40.547,-28.197 h0.9
  text "GP18" at -3.716,-28.197 h0.9
  text "GP11" at -40.508,-30.736 h0.9
  text "GP17" at -3.713,-30.737 h0.9
  text "GP12" at -40.541,-33.276 h0.9
  text "GP16" at -3.717,-33.277 h0.9
  text "GP13" at -40.534,-35.817 h0.9
  text "RUN" at -3.575,-35.813 h0.9
  text "GP14" at -40.545,-38.356 h0.9
  text "SWD" at -3.637,-38.356 h0.9
  text "GP15" at -40.539,-40.897 h0.9
  text "SWCLK" at -4.315,-40.896 h0.9
  text "Raspberry Pi RP2040" at -24.123,-43.282 h1
  text "GND" at -40.445,-43.436 h0.9
  text "GND" at -3.615,-43.436 h0.9
  text "Minimal Design Example  REV1" at -25.316,-45.182 h1

## Text inside footprints (layer, text, board x,y; h text height)
J1: Dwgs.User "PCB edge" at -22.113,3.229 h0.5